# EAGLE board teensy 4 x100 (EAGLE 7.7.0)
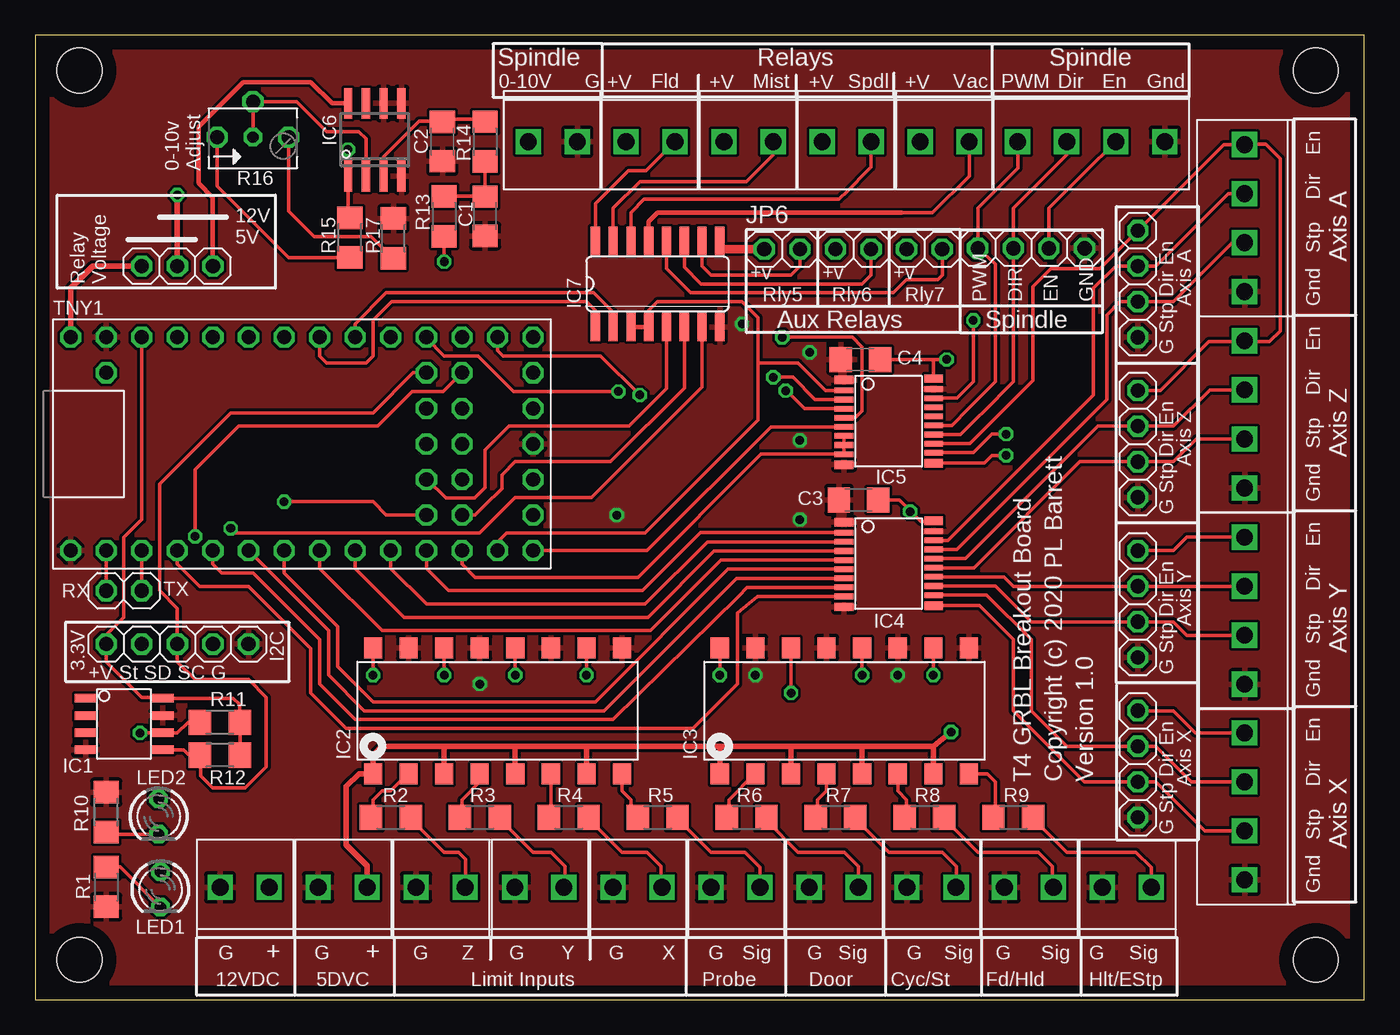
[diagram p0: board, top side]
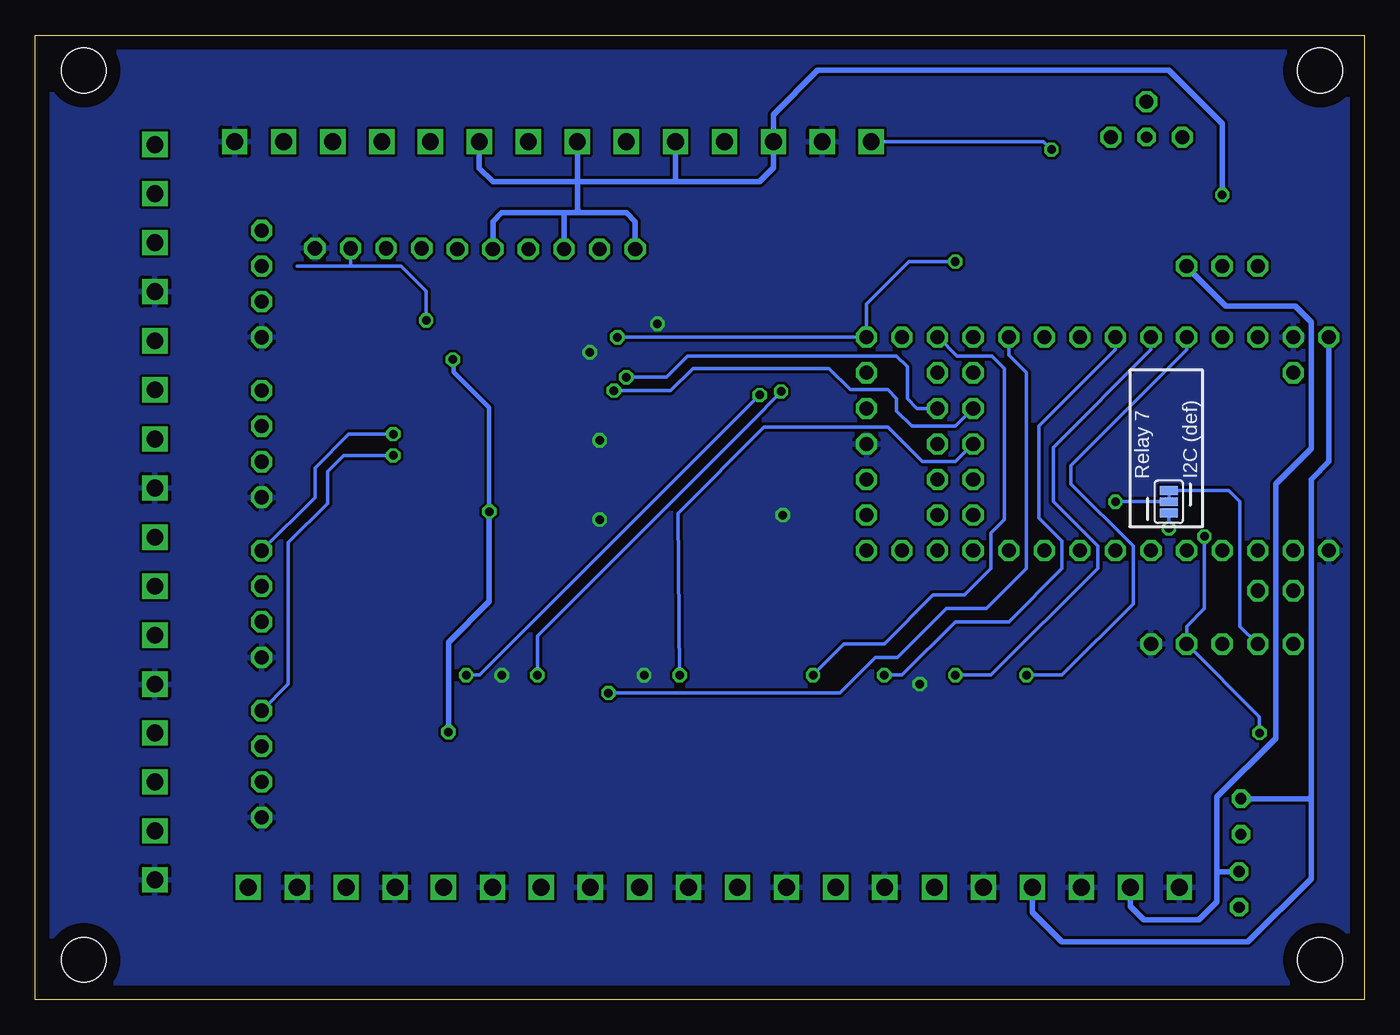
[diagram p1: board, bottom side, seen from below]

Size 94.92 x 68.89 mm. Coordinates in mm from the lower left corner, seen from the top.
Outline: 0,0 94.92,0 94.92,68.89 0,68.89 0,0
Copper layers (1*16): Top 0.035mm / dielectric 1.5mm / Bottom 0.035mm
Design rules "default": minimum track width 10mil, minimum drill 24mil, track to track 8mil, track to pad 8mil, pad to pad 8mil, via to via 8mil, smd to smd 8mil, copper to edge 40mil, drill to drill 8mil, minimum pad ring 10mil, minimum via ring 8mil, stop-mask expansion 4mil, vias tented up to drill 0mil, thermal gap 10mil
Holes 3.2 mm at 3.17,66.36 3.17,2.86 91.44,2.86 91.44,66.36

## Footprints (pad centres in the part's own frame; a part is rotated, then mirrored left to right if it is on the bottom)
C1206 = smd 1.6 x 1.8: 1 -1.4,0; 2 1.4,0
SOIC-8(MICROCHIP) = smd 0.6 x 1.55: P$1 -1.841,-2.74; P$2 -0.614,-2.74; P$3 0.614,-2.74; P$4 1.841,-2.74; P$5 1.841,2.781; P$6 0.614,2.781; P$7 -0.614,2.781; P$8 -1.841,2.781
DIL16-SMD = smd 1.5 x 1.3: A0 -4.5,8.89; A1 -4.5,3.81; A2 -4.5,-1.27; A3 -4.5,-6.35; C0 4.5,8.89; C1 4.5,3.81; C2 4.5,-1.27; C3 4.5,-6.35; E0 4.5,6.35; E1 4.5,1.27; E2 4.5,-3.81; E3 4.5,-8.89; K0 -4.5,6.35; K1 -4.5,1.27; K2 -4.5,-3.81; K3 -4.5,-8.89
TSSOP20 = smd 0.6 x 1.35: P$1 -3.3,-3.2; P$10 2.75,-3.2; P$11 2.65,3.2; P$20 -3.4,3.2 | smd 0.4 x 1.35: P$2 -2.55,-3.2; P$3 -1.9,-3.2; P$4 -1.25,-3.2; P$5 -0.6,-3.2; P$6 0.05,-3.2; P$7 0.7,-3.2; P$8 1.35,-3.2; P$9 2,-3.2; P$12 1.9,3.2; P$13 1.25,3.2; P$14 0.6,3.2; P$15 -0.05,3.2; P$16 -0.7,3.2; P$17 -1.35,3.2; P$18 -2,3.2; P$19 -2.65,3.2
SO08 = smd 0.6 x 2.2: 1 -1.905,-2.6; 2 -0.635,-2.6; 3 0.635,-2.6; 4 1.905,-2.6; 5 1.905,2.6; 6 0.635,2.6; 7 -0.635,2.6; 8 -1.905,2.6
SO16 = smd 0.66 x 2.032: 1 -4.445,-3.073; 2 -3.175,-3.073; 3 -1.905,-3.073; 4 -0.635,-3.073; 5 0.635,-3.073; 6 1.905,-3.073; 7 3.175,-3.073; 8 4.445,-3.073; 9 4.445,3.073; 10 3.175,3.073; 11 1.905,3.073; 12 0.635,3.073; 13 -0.635,3.073; 14 -1.905,3.073; 15 -3.175,3.073; 16 -4.445,3.073
1X04 = drill 1.016 octagon: 1 -3.81,0; 2 -1.27,0; 3 1.27,0; 4 3.81,0
1X02 = drill 1.016 octagon: 1 -1.27,0; 2 1.27,0
1X03 = drill 1.016 octagon: 1 -2.54,0; 2 0,0; 3 2.54,0
1X06 = drill 1.016 octagon: 1 -6.35,0; 2 -3.81,0; 3 -1.27,0; 4 1.27,0; 5 3.81,0; 6 6.35,0
1X05 = drill 1.016 octagon: 1 -5.08,0; 2 -2.54,0; 3 0,0; 4 2.54,0; 5 5.08,0
SMT-JUMPER_3_NO_SILK = smd 0.635 x 1.27: 1 -0.813,0; 2 0,0; 3 0.813,0
LED3MM = drill 0.813 octagon: A -1.27,0; K 1.27,0
R1206 = smd 1.6 x 1.803: 1 -1.422,0; 2 1.422,0
B64Y = drill 1 octagon: A 2.54,0; E -2.54,0; S1 0,2.54 | drill 0.813 octagon: S 0,0
TEENSY4.0 = drill 1 octagon: 0 -7.62,13.97; 1 -7.62,11.43; 2 -7.62,8.89; 3 -7.62,6.35; 3.30 -2.54,-16.51; 3.31 7.62,11.43; 4 -7.62,3.81; 5 -7.62,1.27; 6 -7.62,-1.27; 7 -7.62,-3.81; 8 -7.62,-6.35; 9 -7.62,-8.89; 10 -7.62,-11.43; 11 -7.62,-13.97; 12 -7.62,-16.51; 13 7.62,-16.51; 14 7.62,-13.97; 15 7.62,-11.43; 16 7.62,-8.89; 17 7.62,-6.35; 18 7.62,-3.81; 19 7.62,-1.27; 20 7.62,1.27; 21 7.62,3.81; 22 7.62,6.35; 23 7.62,8.89; 24 5.08,-11.43; 25 5.08,-8.89; 26 2.54,-11.43; 27 2.54,-8.89; 28 0,-11.43; 29 0,-8.89; 30 -2.54,-11.43; 31 -2.54,-8.89; 32 -5.08,-11.43; 33 -5.08,-8.89; GND -7.62,16.51; GND1 0,-16.51; GND2 7.62,13.97; ON/OFF 5.08,-16.51; PROG 2.54,-16.51; VBAT -5.08,-16.51; VIN 7.62,16.51; VUSB 5.08,13.97
T35-2 = drill 1.2 square: P$1 1.75,0; P$2 -1.75,0
T35-4 = drill 1.2 square: P$1 3.5,0; P$2 0,0; P$3 -3.5,0; P$4 -7,0

## Placement (x,y rotation side)
C1  1uF  [C1206]  32.13,55.94 270 top
C2  100n  [C1206]  29.08,61.28 270 top
C3  100n  [C1206]  58.8,35.69 180 top
C4  100n  [C1206]  58.93,45.72 180 top
IC1  24LCxxx  [SOIC-8(MICROCHIP)]  6.35,19.68 270 top
IC2  LTV846S  [DIL16-SMD]  33.02,20.64 90 top
IC3  LTV846S  [DIL16-SMD]  57.78,20.64 90 top
IC4  74AHCT541A  [TSSOP20]  60.96,30.8 270 top
IC5  74AHCT541A  [TSSOP20]  60.96,40.96 270 top
IC6  LM358D  [SO08]  24.26,61.4 0 top
IC7  ULN2003AD  [SO16]  44.45,51.12 0 top
JP1  PINHD-1X4  [1X04]  78.74,16.83 90 top
JP2  PINHD-1X4  [1X04]  78.74,28.26 90 top
JP3  PINHD-1X2  [1X02]  6.35,29.21 0 top
JP4  PINHD-1X4  [1X04]  78.74,39.69 90 top
JP5  PINHD-1X3  [1X03]  10.16,52.39 180 top
JP6  [1X06]  58.42,53.59 0 top
JP7  PINHD-1X4  [1X04]  71.12,53.66 0 top
JP8  PINHD-1X4  [1X04]  78.74,51.12 90 top
JP9  [1X05]  10.16,25.4 0 top
JP10  JUMPER-SMT_3_NO_SILK  [SMT-JUMPER_3_NO_SILK]  13.97,35.56 90 bottom
LED1  [LED3MM]  8.95,7.87 270 top
LED2  [LED3MM]  8.83,13.08 270 top
R1  1500  [R1206]  5.08,8.06 90 top
R2  330  [R1206]  25.4,13.02 180 top
R3  330  [R1206]  31.75,13.02 180 top
R4  330  [R1206]  38.1,13.02 180 top
R5  330  [R1206]  44.45,13.02 180 top
R6  330  [R1206]  50.8,13.02 180 top
R7  330  [R1206]  57.15,13.02 180 top
R8  330  [R1206]  63.5,13.02 180 top
R9  330  [R1206]  69.85,13.02 180 top
R10  330  [R1206]  5.08,13.4 270 top
R11  2.4K  [R1206]  13.21,19.81 0 top
R12  2.4K  [R1206]  13.21,17.46 0 top
R13  10K  [R1206]  29.21,55.94 90 top
R14  10K  [R1206]  32.13,61.28 90 top
R15  4.7K  [R1206]  22.48,54.42 270 top
R16  10K  [B64Y]  15.56,61.59 0 top
R17  10K  [R1206]  25.59,54.36 270 top
TNY1  [TEENSY4.0]  19.05,39.69 90 top
TR1  T35-2  [T35-2]  14.96,8.02 0 top
TR2  T35-2  [T35-2]  21.96,8.02 0 top
TR3  T35-2  [T35-2]  77.96,8.02 0 top
TR4  T35-2  [T35-2]  70.96,8.02 0 top
TR5  T35-2  [T35-2]  64.01,8.02 0 top
TR6  T35-2  [T35-2]  57.03,8.02 0 top
TR7  T35-2  [T35-2]  50.01,8.02 0 top
TR8  T35-2  [T35-2]  43.01,8.02 0 top
TR9  T35-2  [T35-2]  36.01,8.02 0 top
TR10  T35-2  [T35-2]  28.96,8.02 0 top
TR11  T35-4  [T35-4]  86.36,15.56 90 top
TR12  T35-4  [T35-4]  86.36,29.53 90 top
TR13  T35-4  [T35-4]  86.36,43.55 90 top
TR14  T35-2  [T35-2]  36.97,61.28 180 top
TR15  T35-2  [T35-2]  43.95,61.28 180 top
TR16  T35-2  [T35-2]  50.95,61.28 180 top
TR17  T35-2  [T35-2]  57.95,61.28 180 top
TR18  T35-2  [T35-2]  64.95,61.28 180 top
TR19  T35-4  [T35-4]  73.66,61.28 180 top
TR20  T35-4  [T35-4]  86.36,57.57 90 top

## Library data of the parts
C1-C4 R1-R15 R17 = rcl
IC1 IC4 IC5 = phils-ic
IC2 IC3 = phils optos
IC6 = linear
IC7 = uln-udn
JP1 JP2 JP4 JP7 JP8 TR11-TR14 TR19 TR20 = T35
JP3 JP5 JP6 JP9 JP10 TR1-TR10 TR15-TR18 = phils connectors
LED1 LED2 = led
R16 = phils
TNY1 = phils modules

## Nets
3.3V: IC1.P$8 JP9.1 R11.2 R12.2 TNY1.3.31
+3.3V: TNY1.3.30
+5V: C3.1 C4.1 IC2.A0 IC2.A1 IC2.A2 IC2.A3 IC3.A0 IC3.A1 IC3.A2 IC3.A3 IC4.P$20 IC5.P$20 JP5.3 LED2.A TNY1.VIN TR2.P$1
+12V: IC6.8 JP5.1 LED1.A TR1.P$1
COOL: IC7.1 TNY1.19
COOLV: IC7.16 TR15.P$2
CYST: IC3.C1 TNY1.17
DIRA: IC4.P$2 TNY1.9
DIRAO: IC4.P$18 JP8.3 TR20.P$2
DIRB: IC5.P$4 TNY1.27
DIRBO: IC5.P$16
DIRX: IC4.P$8 TNY1.3
DIRXO: IC4.P$12 JP1.3 TR11.P$2
DIRY: IC4.P$6 TNY1.5
DIRYO: IC4.P$14 JP2.3 TR12.P$2
DIRZ: IC4.P$4 TNY1.7
DIRZO: IC4.P$16 JP4.3 TR13.P$2
DOOR: IC3.C0 TNY1.29
FHOLD: IC3.C2 TNY1.16
GND: C1.2 C2.2 C3.2 C4.2 IC1.P$4 IC1.P$7 IC2.E0 IC2.E1 IC2.E2 IC2.E3 IC3.E0 IC3.E1 IC3.E2 IC3.E3 IC4.P$1 IC4.P$10 IC4.P$19 IC5.P$1 IC5.P$10 IC5.P$19 IC6.4 IC6.5 IC6.6 IC7.8 JP1.1 JP2.1 JP4.1 JP7.4 JP8.1 JP9.5 R1.1 R10.1 R17.1 TNY1.GND TNY1.GND1 TNY1.GND2 TR1.P$2 TR2.P$2 TR3.P$2 TR4.P$2 TR5.P$2 TR6.P$2 TR7.P$2 TR8.P$2 TR9.P$2 TR10.P$2 TR11.P$4 TR12.P$4 TR13.P$4 TR14.P$2 TR19.P$4 TR20.P$4
KPSTR: JP9.2 JP10.3
LIMA: TNY1.23
LIMB: TNY1.28
LIMX: IC2.C2 TNY1.20
LIMY: IC2.C1 TNY1.21
LIMZ: IC2.C0 TNY1.22
MIST: IC7.2 TNY1.18
MISTV: IC7.15 TR16.P$2
N$1: IC3.K0 R6.2
N$2: LED2.K R10.2
N$3: IC3.K1 R7.2
N$4: LED1.K R1.2
N$5: IC3.K2 R8.2
N$6: IC2.K0 R2.2
N$7: IC2.K1 R3.2
N$8: IC2.K2 R4.2
N$9: IC2.K3 R5.2
N$10: IC3.K3 R9.2
N$20: C1.1 R13.2 R14.1
N$21: C2.1 IC6.3 R14.2
N$22: R15.2 R16.E
N$23: IC6.2 R16.S R16.S1
N$24: R16.A R17.2
N$28: R2.1 TR10.P$1
N$29: R3.1 TR9.P$1
N$30: R4.1 TR8.P$1
N$31: R5.1 TR7.P$1
N$32: R6.1 TR6.P$1
N$33: R7.1 TR5.P$1
N$34: R8.1 TR4.P$1
N$35: R9.1 TR3.P$1
P33: JP10.2 TNY1.33
PANIC: IC3.C3 TNY1.14
PRB: IC2.C3 TNY1.15
RLY5: IC7.5 TNY1.31
RLY5O: IC7.12 JP6.6
RLY6: IC7.6 TNY1.32
RLY6O: IC7.11 JP6.4
RLY7: IC7.7 JP10.1
RLY7O: IC7.10 JP6.2
RLYV: IC7.9 JP5.2 JP6.1 JP6.3 JP6.5 TR15.P$1 TR16.P$1 TR17.P$1 TR18.P$1
RX1: JP3.1 TNY1.0
SCL: IC1.P$6 JP9.4 R11.1 TNY1.24
SDA: IC1.P$5 JP9.3 R12.1 TNY1.25
SPDI: IC5.P$6 TNY1.12
SPDIO: IC5.P$14 JP7.2 TR19.P$2
SPEN: IC5.P$2 IC7.3 IC7.4 TNY1.11
SPENO: IC5.P$18 JP7.3 TR19.P$3
SPENV: IC7.14 TR17.P$2
SPV_10: IC6.1 R15.1 TR14.P$1
SPWM: IC5.P$5 R13.1 TNY1.13
SPWMO: IC5.P$15 JP7.1 TR19.P$1
STEN: IC5.P$7 IC5.P$8 IC5.P$9 TNY1.10
STEN1: TNY1.30
STENOX: IC5.P$11 JP1.4 TR11.P$1
STENOY: IC5.P$12 JP2.4 TR12.P$1
STENOZA: IC5.P$13 JP4.4 JP8.4 TR13.P$1 TR20.P$1
STPA: IC4.P$3 TNY1.8
STPAO: IC4.P$17 JP8.2 TR20.P$3
STPB: IC5.P$3 TNY1.26
STPBO: IC5.P$17
STPX: IC4.P$9 TNY1.2
STPXO: IC4.P$11 JP1.2 TR11.P$3
STPY: IC4.P$7 TNY1.4
STPYO: IC4.P$13 JP2.2 TR12.P$3
STPZ: IC4.P$5 TNY1.6
STPZO: IC4.P$15 JP4.2 TR13.P$3
TX1: JP3.2 TNY1.1
VACV: IC7.13 TR18.P$2

## Tracks (layer width: path | path; a pad name or v marks a point on that pad's centre or on a via)
3.3V
  Top 0.254: TNY1.3.31 7.62,34.29 6.35,33.02 6.35,27.3 5.08,26.04 JP9.1 5.08,24.13 7.62,21.59 8.26,21.59 8.32,21.53 IC1.P$8 14.16,21.53 14.61,21.08 14.61,19.84 R11.2 R12.2
+5V  (via drill 0.61)
  Top 0.254: IC4.P$20 64.13,34.16 63.25,34.16 v62.48,34.86 62.48,34.92 61.72,35.69 C3.1 | C4.1 64.26,45.72 | 64.26,45.72 v65.09,45.72 | IC5.P$20 64.16,45.62 64.26,45.72
  Top 0.406: 29.21,18.1 24.77,18.1 24.13,17.46 IC2.A0 23.12,16.14 22.23,15.24 22.23,11.05 23.71,9.56 TR2.P$1 | 29.21,18.1 34.29,18.1 | 34.29,18.1 39.37,18.1 | 39.37,18.1 48.9,18.1 | 48.9,18.1 53.98,18.1 | 53.98,18.1 59.05,18.1 | 59.05,18.1 64.14,18.1 | 64.14,18.1 IC3.A3 | IC3.A2 59.05,18.1 | IC3.A1 53.98,18.1 | IC3.A0 48.9,18.1 | IC2.A3 39.37,18.1 | IC2.A2 34.29,18.1 | IC2.A1 29.21,18.1 | TNY1.VIN 2.54,50.8 4.13,52.39 JP5.3 | 64.14,18.1 v65.41,19.11
  Bottom 0.254: 62.48,42.16 62.48,42.29 | 65.02,45.66 v65.09,45.72
  Bottom 0.305: 62.48,42.16 v62.48,34.86 | 62.48,42.29 65.02,44.83 65.02,45.66
  Bottom 0.406: TNY1.VIN 2.54,38.42 3.81,37.15 3.81,14.48 | 3.81,14.48 3.81,8.64 8.32,4.13 21.59,4.13 23.71,6.25 TR2.P$1 | v65.41,19.11 65.41,25.53 62.48,28.45 v62.48,34.86 | LED2.A 3.94,14.35 3.81,14.48
+12V
  Top 0.305: IC6.8 21.21,64 19.68,65.53 14.86,65.53 11.68,62.36 11.68,58.29 12.7,57.28 JP5.1
  Bottom 0.406: 12.7,52.32 9.91,49.53 4.95,49.53 3.81,48.39 3.81,39.37 6.35,36.83 6.35,18.67 10.54,14.48 10.54,9.02 | TR1.P$1 16.71,6.68 15.75,5.71 11.81,5.71 10.54,6.99 10.54,9.02 | LED1.A 10.41,9.14 10.54,9.02
  Bottom 0.61: JP5.1 12.7,52.32
COOL
  Top 0.254: TNY1.19 20.32,45.97 20.83,45.47 23.62,45.47 24.13,45.97 24.13,48.51 25.46,49.85 39.37,49.85 40.01,49.21 IC7.1
COOLV
  Top 0.254: IC7.16 40.01,56.83 42.39,59.22 43.64,59.22 TR15.P$2
CYST  (via drill 0.61)
  Top 0.254: v53.98,21.91 IC3.C1
  Bottom 0.254: TNY1.17 25.4,46.04 24.13,44.77 24.13,30.8 26.99,27.94 29.84,27.94 33.34,24.45 34.92,24.45 37.47,21.91 v53.98,21.91
DIRA
  Top 0.254: TNY1.9 27.94,30.8 29.53,29.21 43.37,29.21 47.51,33.35 IC4.P$2
DIRAO
  Top 0.254: TR20.P$2 85.19,57.57 80.01,52.39 JP8.3 77.15,52.39 75.56,50.8 75.56,43.18 65.18,32.8 IC4.P$18
DIRB  (via drill 0.61)
  Top 0.254: v53.59,43.5 53.66,43.5 54.95,42.21 IC5.P$4
  Bottom 0.254: TNY1.27 29.21,40.96 32.32,40.96 33.4,42.04 33.4,42.93 34.04,43.56 36.7,43.56 38.23,45.09 47.94,45.09 49.53,43.5 v53.59,43.5
DIRX
  Top 0.254: TNY1.3 12.7,31.11 13.34,30.48 15.56,30.48 20.32,25.72 20.32,22.54 22.86,20 41.27,20 50.21,28.81 50.85,29.45 IC4.P$8
DIRXO
  Top 0.254: TR11.P$2 82.55,15.56 80.01,18.1 JP1.3 73.66,18.1 71.12,20.64 71.12,25.72 67.94,28.9 IC4.P$12
DIRY
  Top 0.254: TNY1.5 17.78,30.48 21.59,26.67 21.59,23.81 24.13,21.27 40.01,21.27 49.48,30.75 IC4.P$6
DIRYO
  Top 0.254: TR12.P$2 JP2.3 69.85,29.53 69.18,30.2 IC4.P$14
DIRZ
  Top 0.254: TNY1.7 22.86,30.8 26.35,27.3 43.75,27.3 48.49,32.05 IC4.P$4
DIRZO
  Top 0.254: TR13.P$2 83.87,43.55 81.28,40.96 JP4.3 75.88,40.96 66.42,31.5 IC4.P$16
DOOR  (via drill 0.61)
  Top 0.254: v48.9,23.18 IC3.C0
  Bottom 0.254: v48.9,23.18 49.02,34.73 42.86,40.89 34.04,40.89 31.56,38.42 29.21,38.42 TNY1.29
FHOLD  (via drill 0.61)
  Top 0.254: IC3.C2 v59.05,23.18 | TNY1.16 27.94,47.24 29.21,45.97 31.62,45.97 34.16,43.43 v41.66,43.43
  Bottom 0.254: v59.05,23.18 59.05,25.97 43.12,41.91 v41.66,43.43
GND  (via drill 0.61)
  other vias: 31.75,22.54 61.59,23.18 54.61,39.94 54.61,34.29 55.31,46.23 50.48,48.26 51.44,23.18 41.53,34.61
  pour Bottom: 0,0 96.52,0 96.52,70.17 0,70.17
  pour Top: 0,-1.27 99.06,-1.27 99.06,71.44 0,71.44
KPSTR
  Bottom 0.254: JP10.3 9.7,36.37 8.89,35.56 8.89,26.67 JP9.2
LIMX  (via drill 0.61)
  Top 0.254: v34.29,23.18 IC2.C2
  Bottom 0.254: TNY1.20 17.78,46.42 23.24,40.96 23.24,34.42 21.59,32.77 21.59,30.8 25.4,26.99 29.21,26.99 33.02,23.18 v34.29,23.18
LIMY  (via drill 0.61)
  Top 0.254: IC2.C1 v29.21,23.18
  Bottom 0.254: v29.21,23.18 26.67,23.18 19.05,30.8 19.05,32.38 22.23,35.56 22.23,39.43 15.24,46.42 TNY1.21
LIMZ  (via drill 0.61)
  Top 0.254: v24.13,23.18 IC2.C0
  Bottom 0.254: TNY1.22 12.7,46.42 20.95,38.16 20.95,36.83 16.51,32.38 16.51,28.26 21.59,23.18 v24.13,23.18
MIST
  Top 0.254: TNY1.18 22.86,48.26 25.08,50.48 39.88,50.48 41.27,49.09 IC7.2
MISTV
  Top 0.254: IC7.15 41.27,56.52 43.18,58.42 49.21,58.42 50.8,58.42 52.7,60.32 TR16.P$2
N$1
  Top 0.254: IC3.K0 51.38,16.14 49.53,14.29 49.53,13.17 R6.2
N$2
  Top 0.254: LED2.K 5.25,11.81 R10.2
N$3
  Top 0.254: IC3.K1 56.52,14.92 55.88,14.29 55.88,12.87 | 55.88,12.38 55.88,12.87 | 55.88,12.87 R7.2
N$4
  Top 0.254: R1.2 6.07,9.49 LED1.K
N$5
  Top 0.254: IC3.K2 61.59,14.92 62.23,14.29 62.23,13.17 R8.2
N$6
  Top 0.254: IC2.K0 26.61,16.14 25.4,14.92 24.77,14.92 24.13,14.29 24.13,13.17 R2.2
N$7
  Top 0.254: IC2.K1 31.75,15.56 30.48,14.29 30.48,13.17 R3.2
N$8
  Top 0.254: IC2.K2 36.83,13.17 R4.2
N$9
  Top 0.254: IC2.K3 41.91,14.92 42.55,14.29 42.55,13.5 R5.2
N$10
  Top 0.254: IC3.K3 68,16.14 68.58,15.56 68.58,13.17 R9.2
N$20
  Top 0.254: R13.2 32.24,57.37 C1.1 R14.1
N$21
  Top 0.254: IC6.3 24.89,60.2 27.43,62.74 29.28,62.74 C2.1 29.34,62.74 29.46,62.87 32.09,62.87 R14.2
N$22
  Top 0.254: R16.E 13.02,58.1 18.12,53 R15.2
N$23
  Top 0.254: R16.S R16.S1 18.67,64.14 20.83,61.98 23.11,61.98 23.62,61.47 IC6.2
N$24
  Top 0.254: R17.2 25.55,52.93 24,54.48 19.94,54.48 18.1,56.33 R16.A
N$28
  Top 0.254: R2.1 26.82,12.93 29.21,10.54 30.23,10.54 30.73,10.03 30.73,8.04 TR10.P$1
N$29
  Top 0.254: R3.1 33.17,12.93 35.56,10.54 36.83,10.54 37.85,9.53 37.85,8.11 TR9.P$1
N$30
  Top 0.254: R4.1 39.52,12.93 41.91,10.54 43.69,10.54 44.7,9.53 44.7,8.08 TR8.P$1
N$31
  Top 0.254: R5.1 45.87,12.93 48.26,10.54 50.67,10.54 51.76,9.45 TR7.P$1
N$32
  Top 0.254: R6.1 52.22,12.8 54.48,10.54 57.78,10.54 58.8,9.53 58.8,8.04 TR6.P$1
N$33
  Top 0.254: R7.1 58.57,12.93 60.96,10.54 64.77,10.54 65.79,9.53 65.79,8.05 TR5.P$1
N$34
  Top 0.254: R8.1 64.92,12.93 67.31,10.54 71.63,10.54 72.64,9.53 72.64,8.09 TR4.P$1
N$35
  Top 0.254: R9.1 71.27,12.93 73.66,10.54 78.61,10.54 79.71,9.44 TR3.P$1
P33  (via drill 0.61)
  Top 0.254: v17.78,35.56 24.13,35.56 25.08,34.61 TNY1.33
  Bottom 0.203: 13.97,36.32 JP10.2
  Bottom 0.254: JP10.2 v17.78,35.56
PANIC  (via drill 0.61)
  Top 0.254: v64.14,23.18 IC3.C3 | v43.18,43.18 40.39,45.97 33.4,45.97 33.02,46.35 TNY1.14
  Bottom 0.254: v64.14,23.18 63.18,23.18 v43.18,43.18
PRB  (via drill 0.61)
  Top 0.254: v39.37,23.18 IC2.C3
  Bottom 0.254: TNY1.15 30.42,47.31 29.08,45.97 26.61,45.97 25.72,45.09 25.72,34.29 26.67,33.34 26.67,30.8 28.57,28.89 30.8,28.89 34.29,25.4 37.15,25.4 v39.37,23.18
RLY5
  Top 0.254: IC7.5 45.09,43.62 42.42,40.96 33.85,40.96 32.13,39.24 32.13,36.58 31.37,35.81 29.34,35.81 28,37.15 TNY1.31
RLY5O
  Top 0.254: IC7.12 45.09,52.2 46.8,50.48 61.28,50.48 62.23,51.44 64.45,51.44 64.77,51.75 JP6.6
RLY6
  Top 0.254: TNY1.32 31.43,34.61 32,35.18 32.07,35.24 33.34,36.51 33.34,37.47 34.29,38.42 41.08,38.42 46.35,43.69 IC7.6
RLY6O
  Top 0.254: IC7.11 46.35,52.32 47.56,51.12 59.05,51.12 59.69,51.75 JP6.4
RLY7  (via drill 0.61)
  Top 0.254: IC7.7 47.62,43.75 39.75,35.88 34.29,35.88 31.75,33.34 17.46,33.34 14.29,33.34 v13.97,33.66
  Bottom 0.254: 14.05,34.67 JP10.1 v13.97,33.66
RLY7O
  Top 0.254: IC7.10 47.62,52.39 48.26,51.75 53.98,51.75 54.61,52.39 JP6.2
RLYV  (via drill 0.61)
  Top 0.406: JP5.2 v10.16,57.47
  Top 0.61: IC7.9 48.9,53.66 48.96,53.59 JP6.1
  Bottom 0.406: v10.16,57.47 10.16,62.55 13.97,66.36 39.05,66.36 42.2,63.21 TR15.P$1 42.2,59.4 43.18,58.42 49.28,58.42 | 57.15,56.2 61.59,56.2 62.23,55.56 JP6.5 | 57.15,56.2 56.33,56.2 | 56.33,56.2 52.7,56.2 52.07,55.56 JP6.1 | 56.33,56.2 56.13,56.39 56.2,56.45 56.2,58.42 | TR17.P$1 56.2,58.42 | 49.28,58.42 56.2,58.42 | TR18.P$1 63.2,59.39 62.23,58.42 56.2,58.42 | JP6.3 57.15,56.2 | TR16.P$1 49.2,58.5 49.28,58.42
RX1
  Top 0.254: TNY1.0 JP3.1
SCL  (via drill 0.61)
  Top 0.254: v11.43,33.08 11.43,37.85 14.54,40.96 24.45,40.96 26.92,43.43 29.15,43.43 TNY1.24 | v7.49,19.05 9.11,19.05 IC1.P$6 9.15,19.05 10.16,19.05 10.92,19.81 R11.1
  Bottom 0.254: v11.43,33.08 11.43,27.94 12.7,26.67 JP9.4 7.49,20.19 v7.49,19.05
SDA
  Top 0.254: TNY1.25 26.99,44.77 24.13,41.91 13.97,41.91 8.89,36.83 8.89,29.21 10.16,27.94 JP9.3 10.16,24.13 11.43,22.86 15.24,22.86 16.51,21.59 16.51,16.64 14.99,15.11 12.7,15.11 11.81,16 11.81,17.44 R12.1 11.72,17.53 10.92,17.53 10.6,17.84 IC1.P$5
SPDI
  Top 0.254: TNY1.12 43.69,32.07 52.53,40.91 IC5.P$6
SPDIO
  Top 0.254: TR19.P$2 73.66,60.33 69.85,56.52 JP7.2 69.85,44.13 67.66,41.94 67.34,41.63 66.08,40.36 IC5.P$14
SPEN
  Top 0.254: TNY1.11 33.02,32.7 33.66,33.34 43.56,33.34 51.63,41.4 51.63,45.4 | IC7.4 43.81,49.21 44.45,49.85 50.48,49.85 51.63,48.7 51.63,45.4 | 51.63,45.4 51.69,45.47 54.48,45.47 56.44,43.51 IC5.P$2
  Top 0.305: IC7.3 IC7.4
SPENO  (via drill 0.61)
  Top 0.254: JP7.3 72.39,56.52 74.93,59.05 TR19.P$3 | v66.99,48.51 66.99,44.13 65.82,42.96 IC5.P$18
  Bottom 0.254: 72.39,52.39 68.77,52.39 66.99,50.61 v66.99,48.51 | 72.39,52.39 76.2,52.39 | JP7.3 72.39,52.39
SPENV
  Top 0.254: IC7.14 42.55,56.2 43.5,57.15 54.93,57.15 57.4,57.15 57.66,57.4 57.78,57.53 59.7,59.45 TR17.P$2
SPV_10  (via drill 0.61)
  Top 0.254: v22.35,60.71 IC6.1 22.35,55.97 R15.1
  Bottom 0.254: TR14.P$1 22.92,61.28 v22.35,60.71
SPWM  (via drill 0.61)
  Top 0.254: v53.34,47.31 58.36,47.31 59.05,46.61 59.05,42.04 58.58,41.56 IC5.P$5 | v29.21,52.7 R13.1
  Bottom 0.254: v53.34,47.31 TNY1.13 35.56,49.66 32.51,52.7 v29.21,52.7
SPWMO
  Top 0.254: TR19.P$1 70.16,59.37 67.31,56.52 JP7.1 68.58,52.51 68.58,44.13 66.72,42.28 65.45,41.01 IC5.P$15
STEN
  Top 0.254: TNY1.10 30.48,31.11 31.43,30.16 43.05,30.16 51.85,38.96 IC5.P$9 IC5.P$8 IC5.P$7
STENOX  (via drill 0.61)
  Top 0.254: TR11.P$1 82.86,19.06 81.28,20.64 JP1.4 | IC5.P$11 67.77,38.31 68.33,38.86 v69.34,38.86
  Bottom 0.254: v69.34,38.86 72.9,38.86 74.04,37.72 74.04,35.43 76.83,32.64 76.83,22.54 JP1.4
STENOY  (via drill 0.61)
  Top 0.254: TR12.P$1 82.24,33.03 81.28,32.07 JP2.4 | 69.28,40.33 v69.34,40.39 68.33,40.39 67,39.06 IC5.P$12
  Bottom 0.254: v69.34,40.39 72.52,40.39 74.93,37.97 74.93,35.88 JP2.4
STENOZA
  Top 0.254: JP4.4 80.33,43.5 83.82,46.99 86.3,46.99 | 86.3,46.99 TR13.P$1 | 86.3,46.99 88.14,46.99 88.9,47.75 88.9,60.07 87.88,61.09 86.38,61.09 TR20.P$1 84.88,61.07 JP8.4 76.01,52.2 72.52,52.2 71.25,50.93 71.25,44.2 66.76,39.71 IC5.P$13
STPA
  Top 0.254: TNY1.8 25.4,30.8 27.94,28.26 43.56,28.26 48,32.7 IC4.P$3
STPAO
  Top 0.254: TR20.P$3 85.5,54.07 81.28,49.85 JP8.2 77.47,49.85 76.52,48.9 76.52,42.86 65.8,32.15 IC4.P$17
STPB  (via drill 0.61)
  Top 0.254: IC5.P$3 55.69,42.86 54.1,44.45 v52.7,44.45
  Bottom 0.254: TNY1.26 31.94,42.23 32.64,42.93 32.64,45.21 33.4,45.97 48.32,45.97 49.85,44.45 v52.7,44.45
STPX
  Top 0.254: IC4.P$9 51.59,28.8 50.16,27.62 50.16,22.54 46.99,19.37 22.23,19.37 19.68,21.91 19.68,25.08 15.24,29.53 11.75,29.53 10.16,31.11 TNY1.2
STPXO
  Top 0.254: TR11.P$3 83.51,12.06 80.01,15.56 JP1.2 74.93,15.56 69.85,20.64 69.85,25.72 67.42,28.15 IC4.P$11
STPY
  Top 0.254: TNY1.4 20.95,26.35 20.95,23.18 23.5,20.64 40.64,20.64 50.1,30.1 IC4.P$7
STPYO
  Top 0.254: TR12.P$3 82.24,26.03 81.28,26.99 JP2.2 71.12,26.99 68.56,29.55 IC4.P$13
STPZ
  Top 0.254: TNY1.6 20.32,30.8 24.77,26.35 43.94,26.35 48.99,31.4 IC4.P$5
STPZO
  Top 0.254: TR13.P$3 82.91,40.05 81.28,38.42 JP4.2 74.61,38.42 67.04,30.85 IC4.P$15
TX1
  Top 0.254: TNY1.1 JP3.2
VACV
  Top 0.254: TR18.P$2 66.7,58.83 64.07,56.2 61.91,56.2
  Top 0.305: IC7.13 43.81,55.56 44.45,56.2 61.91,56.2

## Text on the board
tPlace: Spindle | Relays | Spindle | 0-10V | G | +V | Fld | +V | Mist | +V | Spdl | +V | Vac | PWM | Dir | En | Gnd | En | 0-10v / Adjust | Dir | 12V / 5V | Stp | Axis A | Relay / Voltage | +v | +v | +v | Rly5 | Rly6 | Rly7 | PWM | DIR | EN | GND | Axis A | Gnd | Aux Relays | Spindle | G Stp Dir En | En | Dir | Stp | Axis Z | Axis Z | Gnd | G Stp Dir En | En | RX | TX | Dir | Axis Y | Stp | Axis Y | I2C | 3.3V | +V St SD SC G | G Stp Dir En | Gnd | En | T4 GRBL Breakout Board | Copyright (c) 2020 PL Barrett | Version 1.0 | Axis X | Dir | G Stp Dir En | Stp | Axis X | Gnd | G | + | G | + | G | Z | G | Y | G | X | G | Sig | G | Sig | G | Sig | G | Sig | G | Sig | 12VDC | 5DVC | Limit Inputs | Probe | Door | Cyc/St | Fd/Hld | Hlt/EStp
bPlace: I2C (def) | Relay 7